# Altium PCB PCB4.PcbDoc
Units mil, origin at the board's own origin, x right, y up, seen from the top; angles counter-clockwise.
Board outline 2952.76 x 2952.76 mil, 4 copper layers (Top Layer, Mid 1 - POWER, Mid 2 - GND, Bottom Layer), stack 61.913 mil thick; 25 components, 43 nets, 198 pads, 183 vias.
Unrouted connection lines stored in the file: 1.
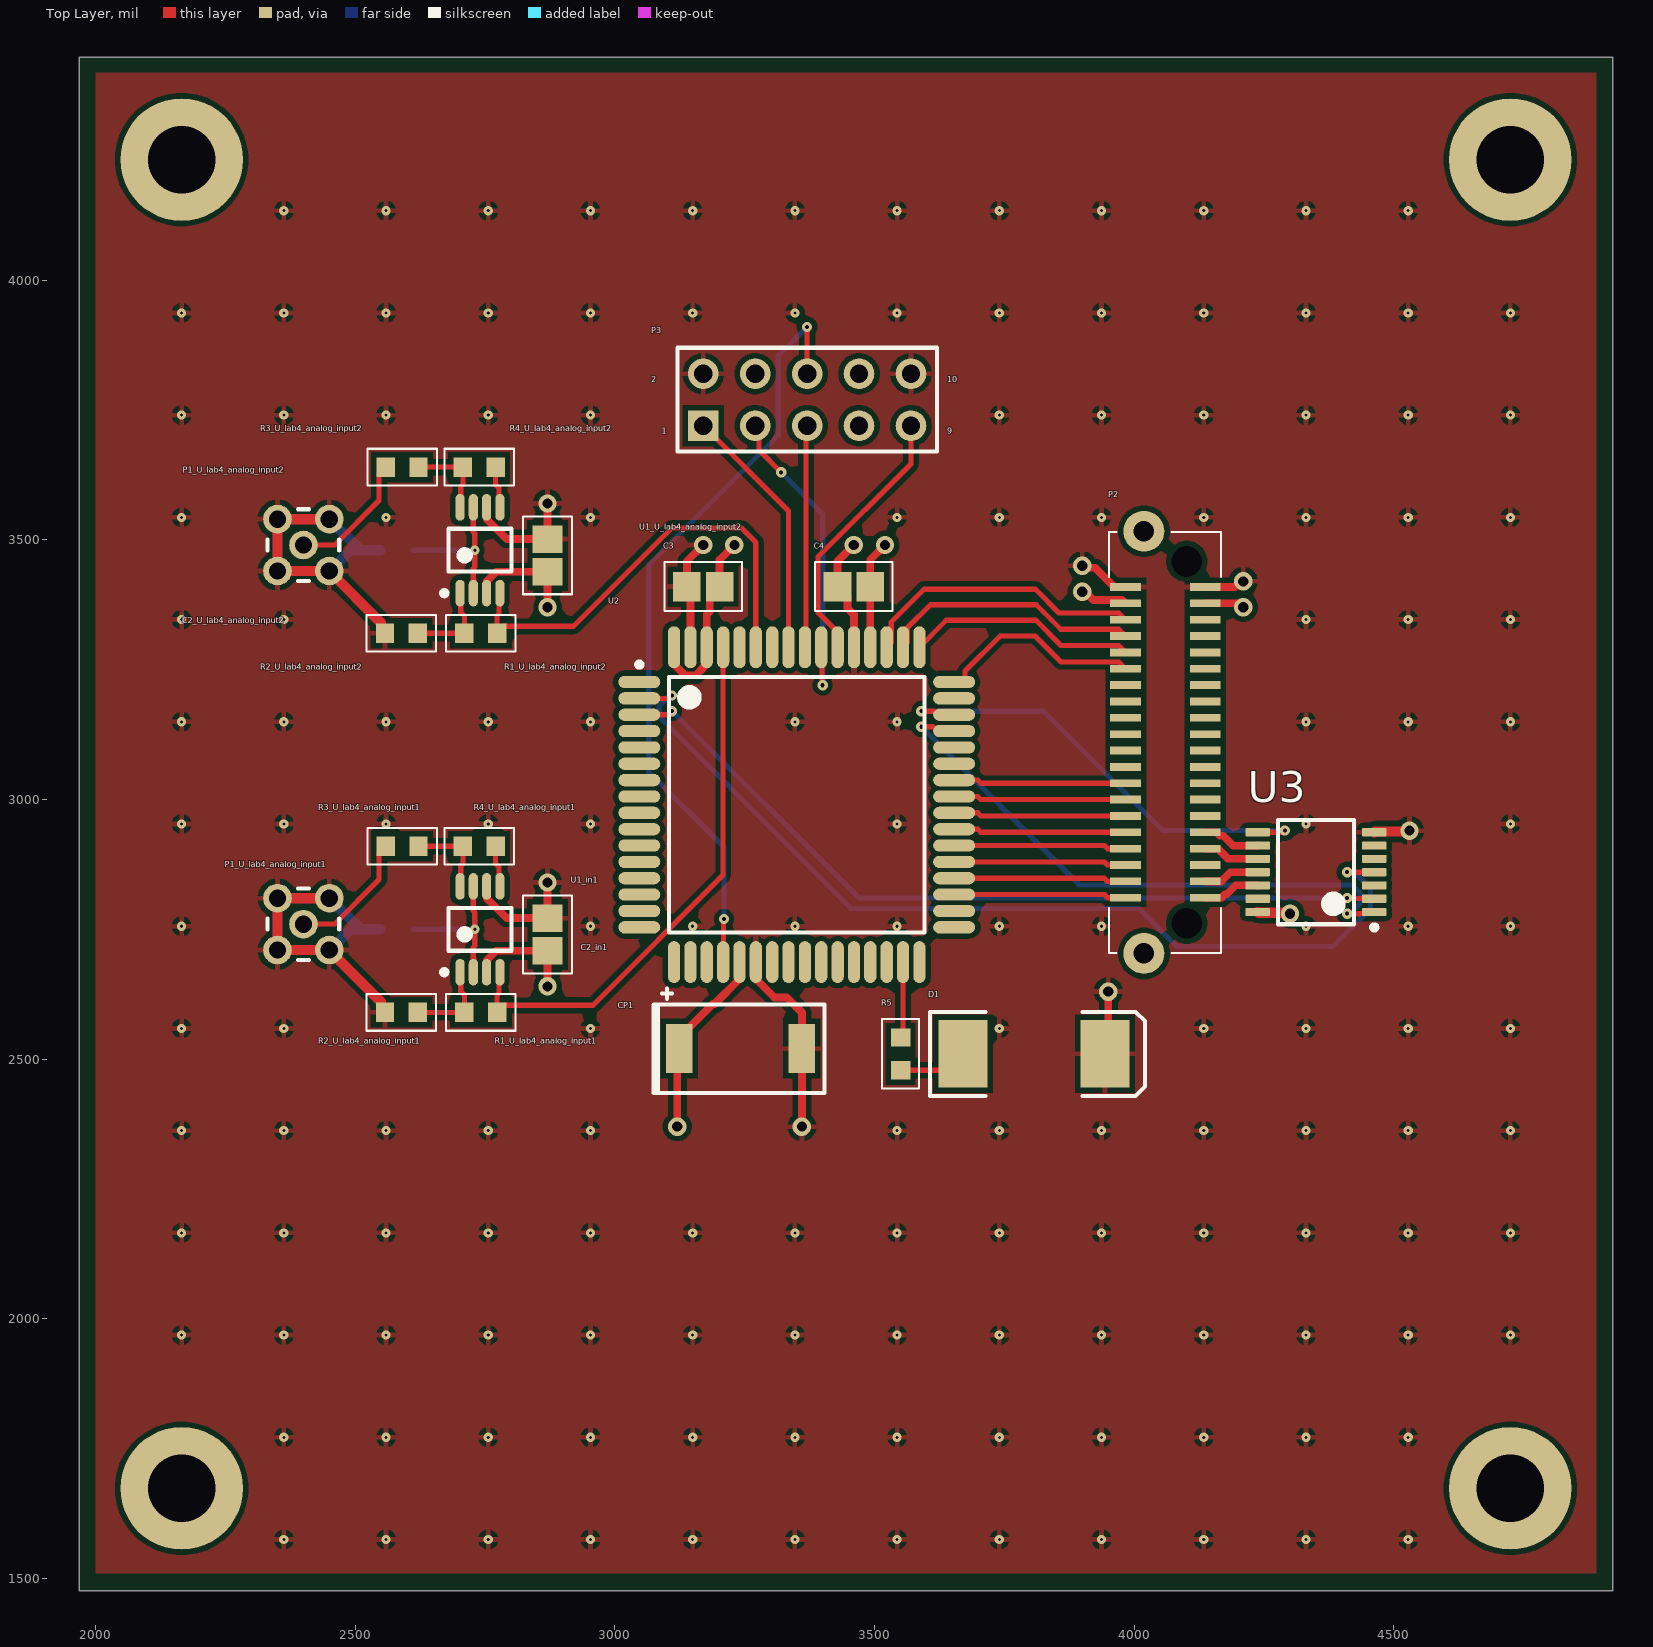
[diagram p0: Top Layer view]
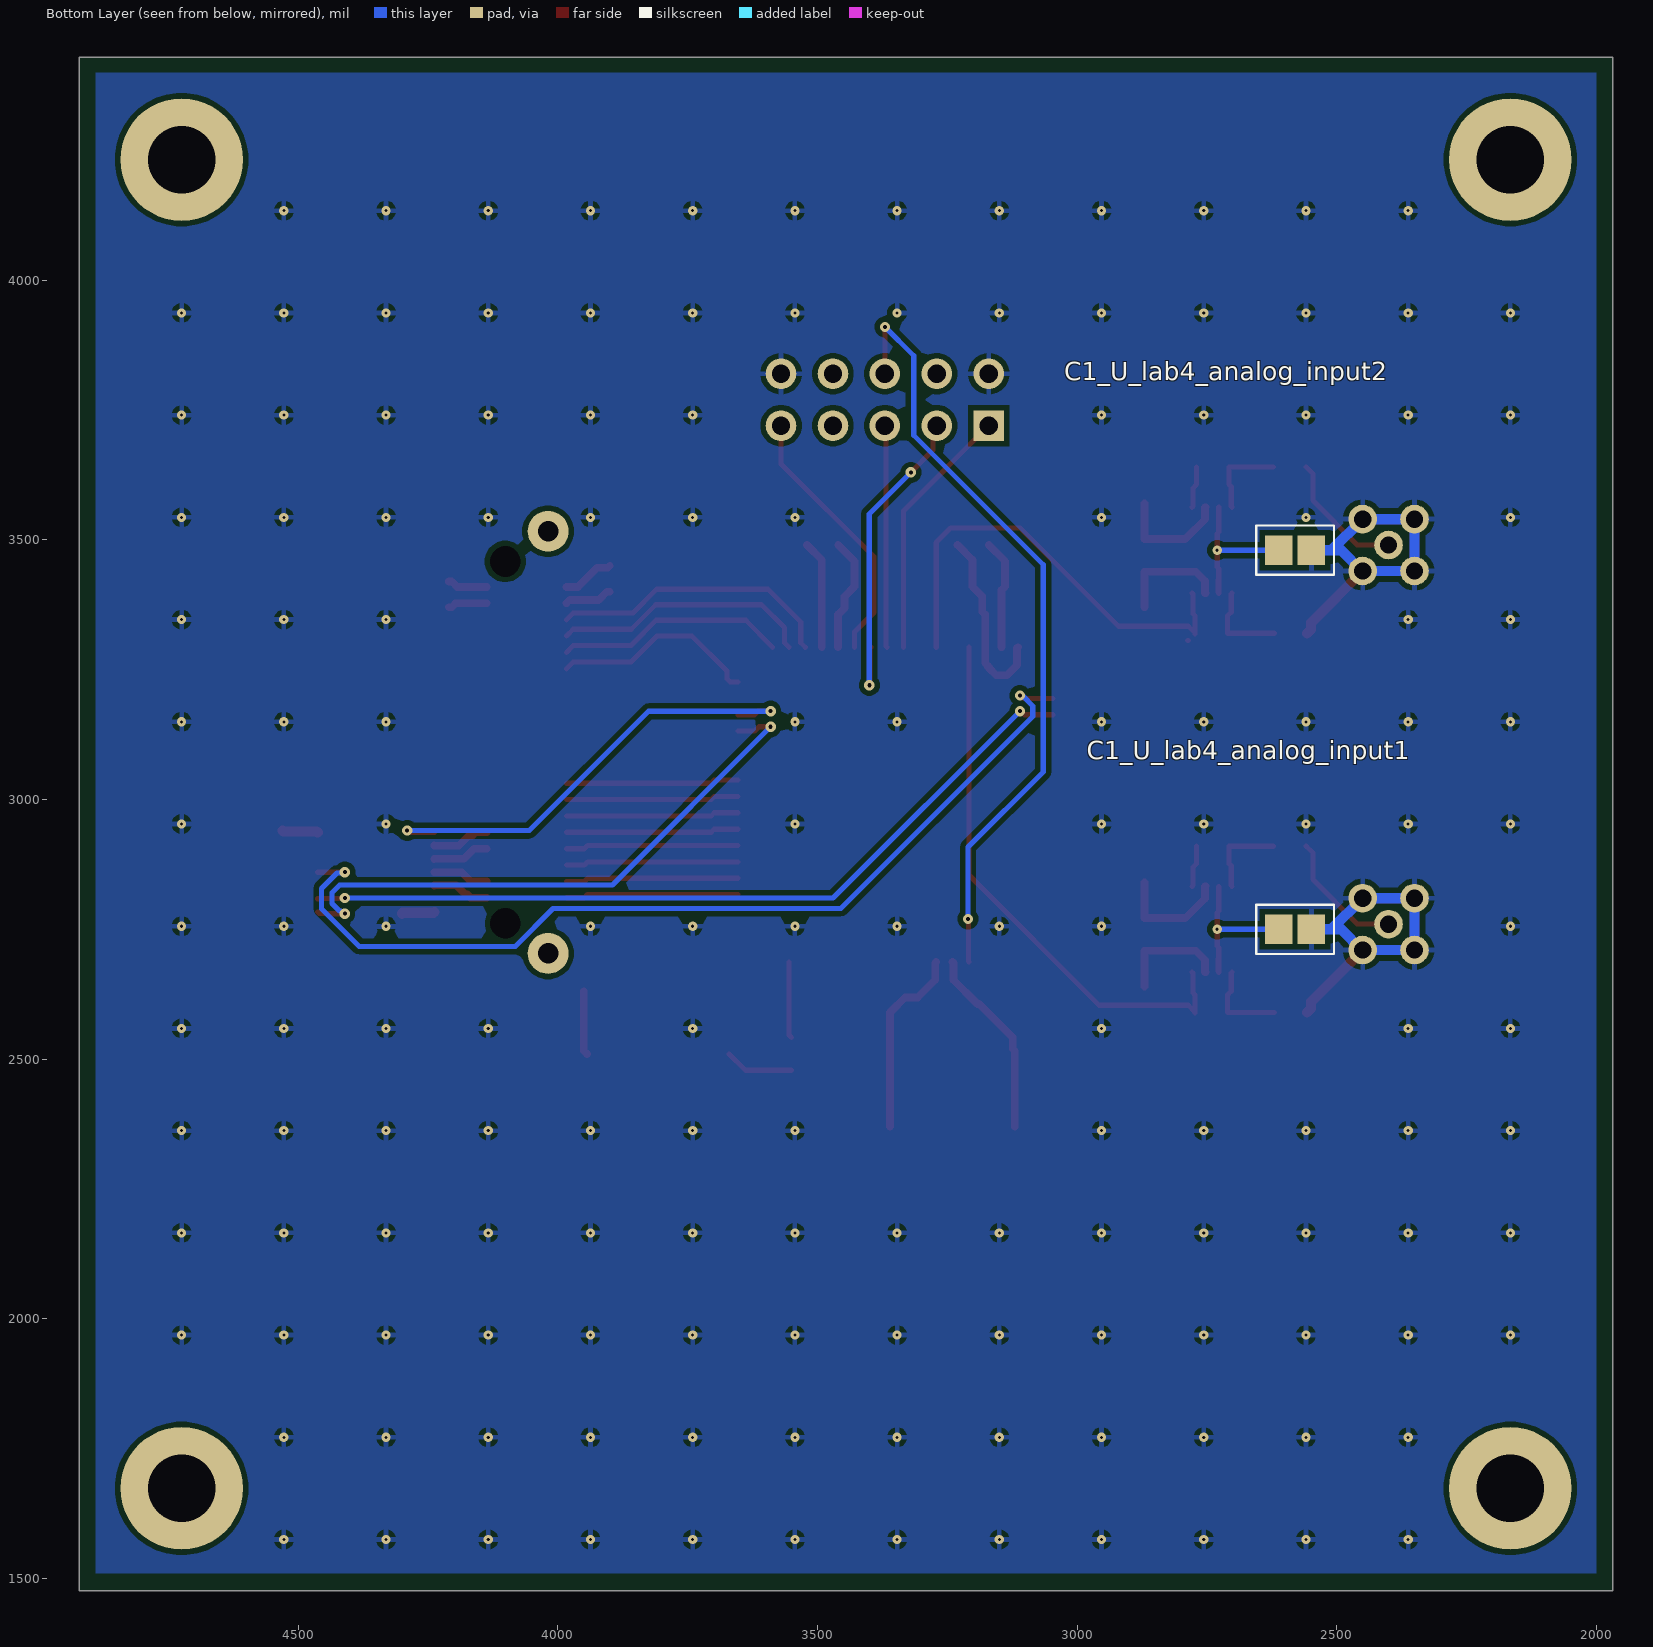
[diagram p1: Bottom Layer view, seen from below]
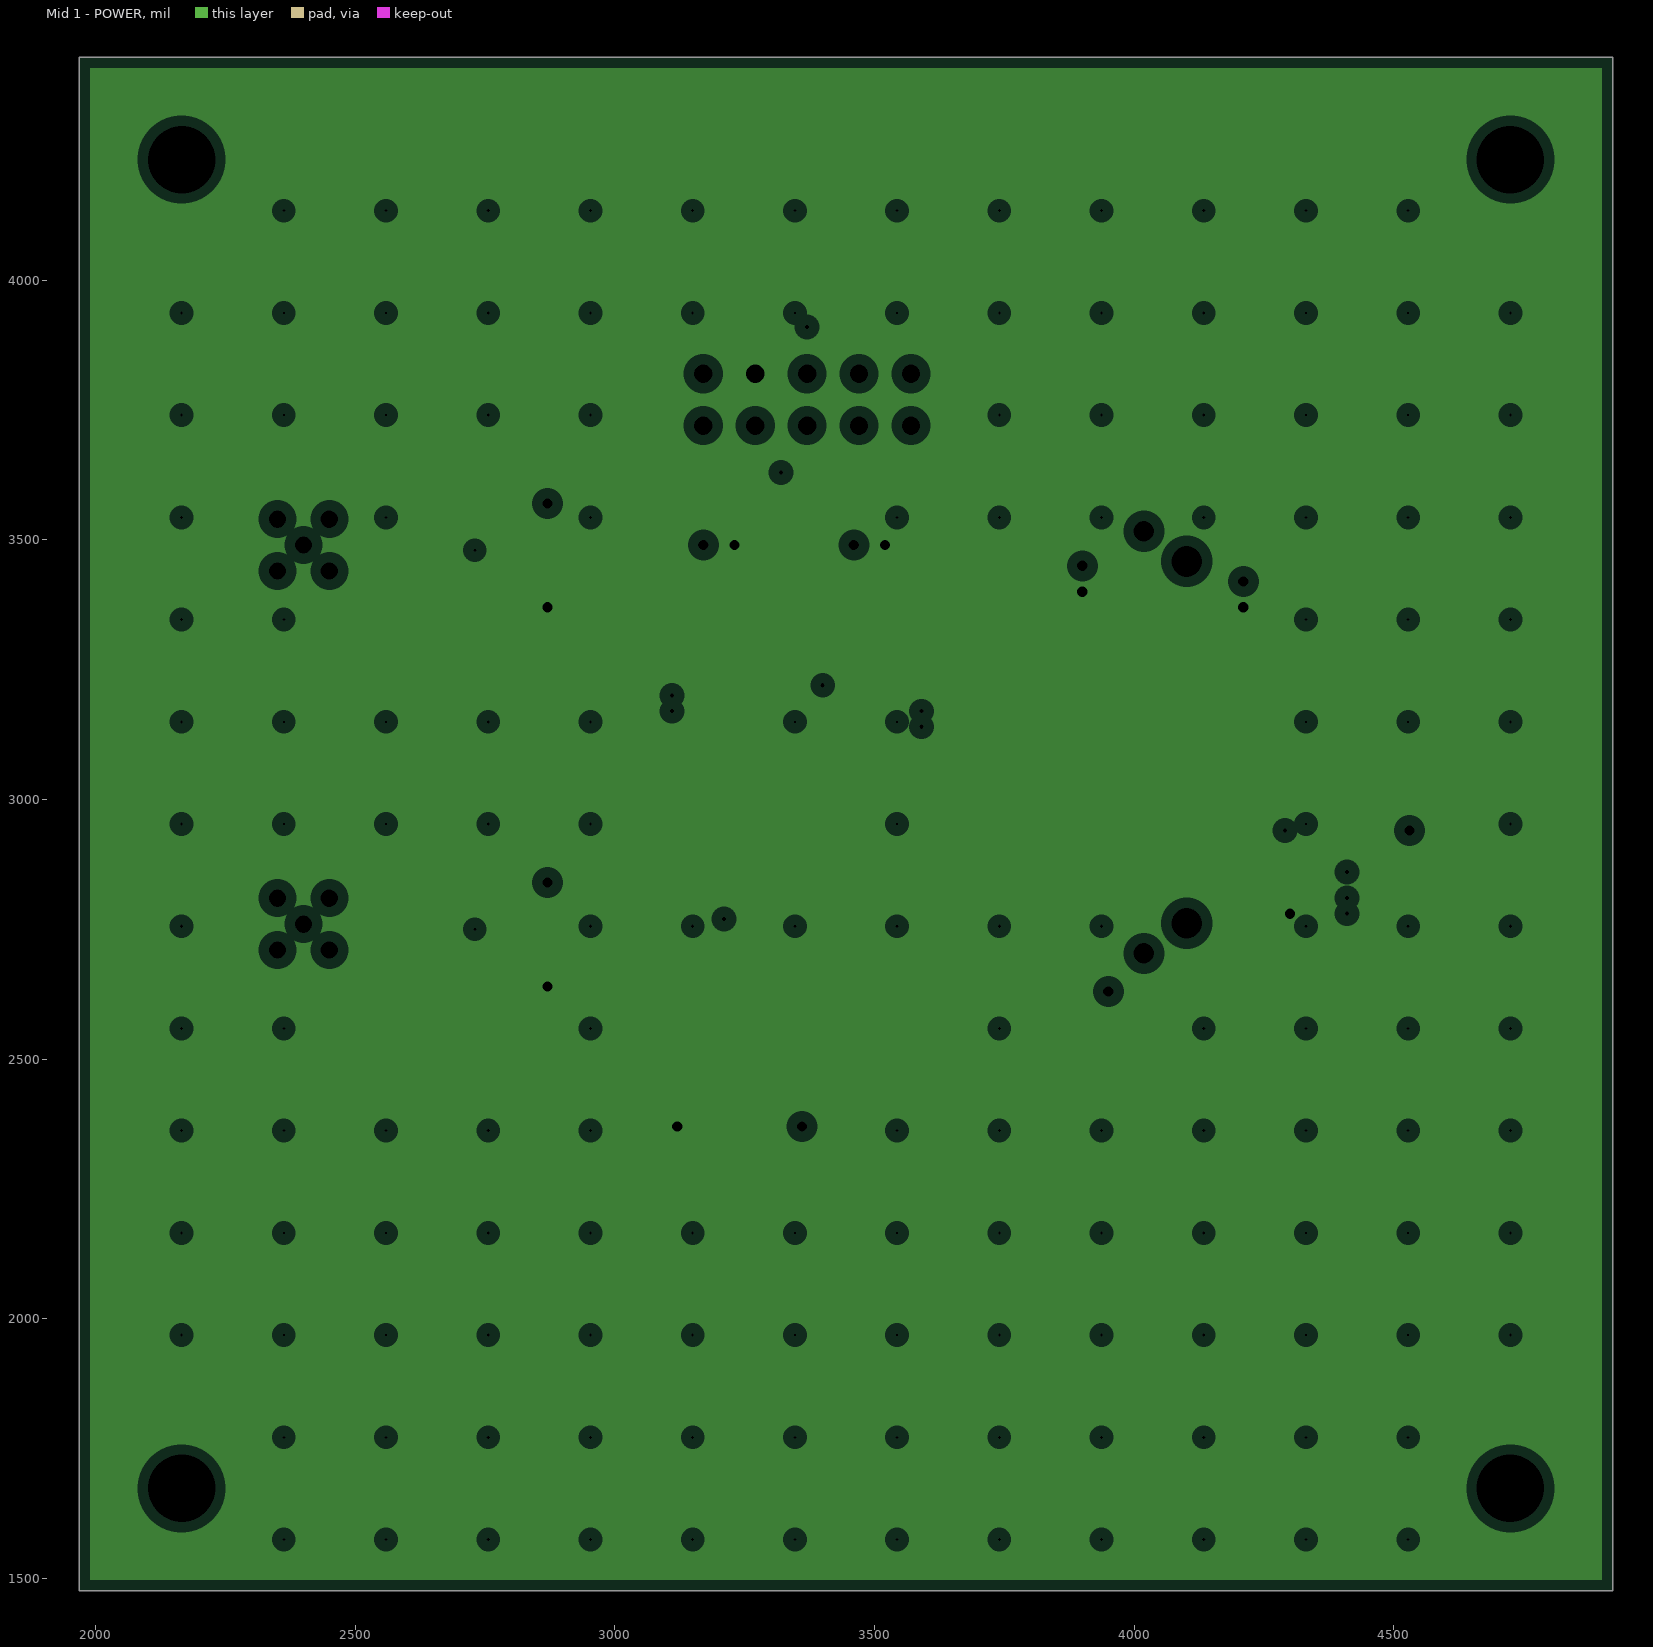
[diagram p2: Mid 1 - POWER, clearances drawn from the general rule]
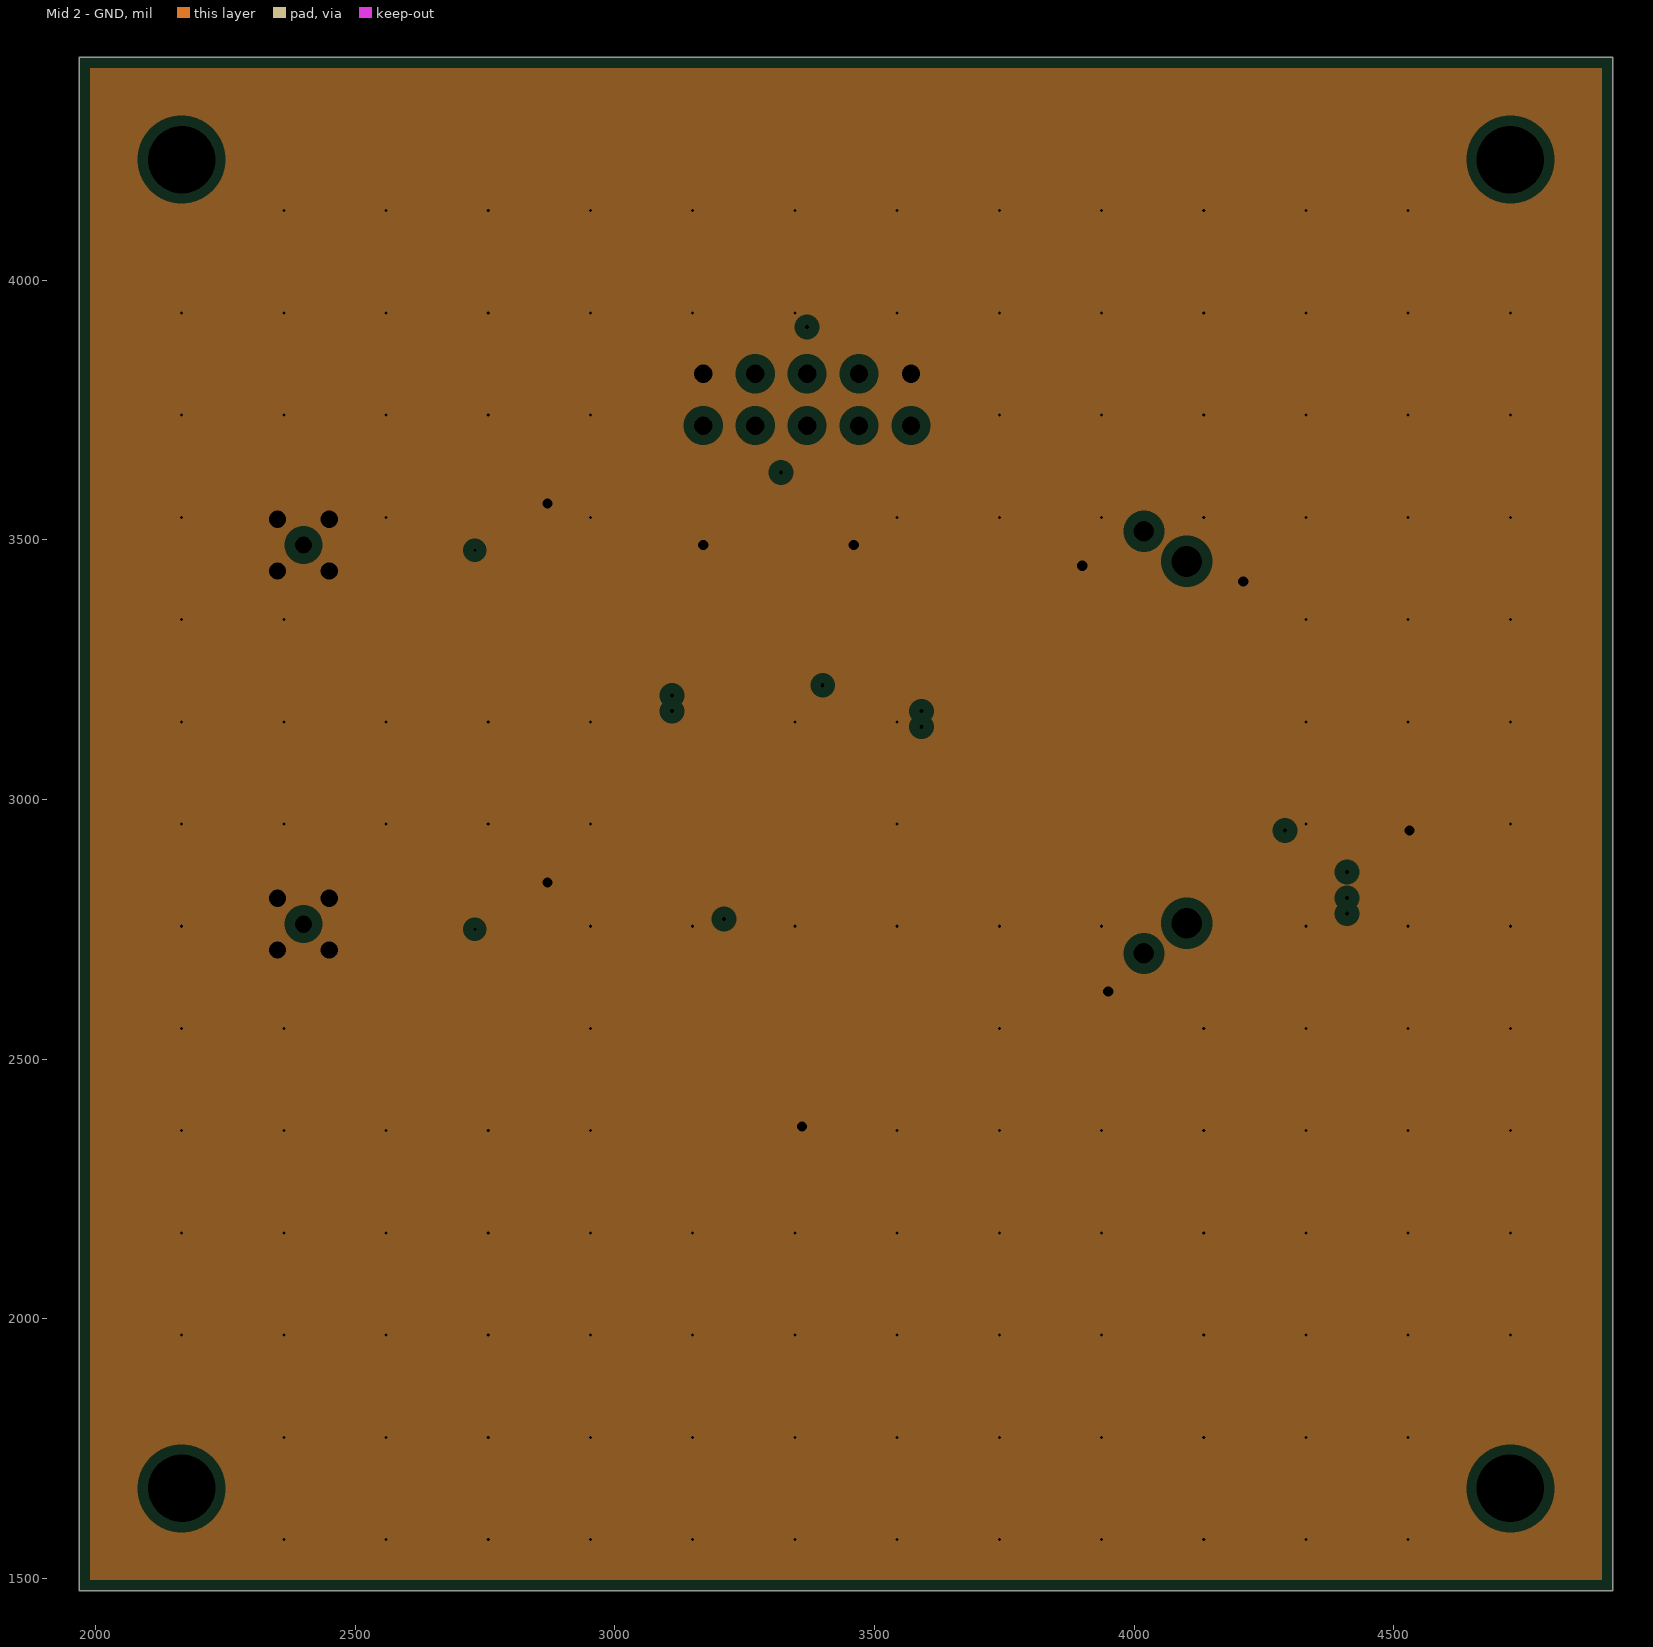
[diagram p3: Mid 2 - GND, clearances drawn from the general rule]
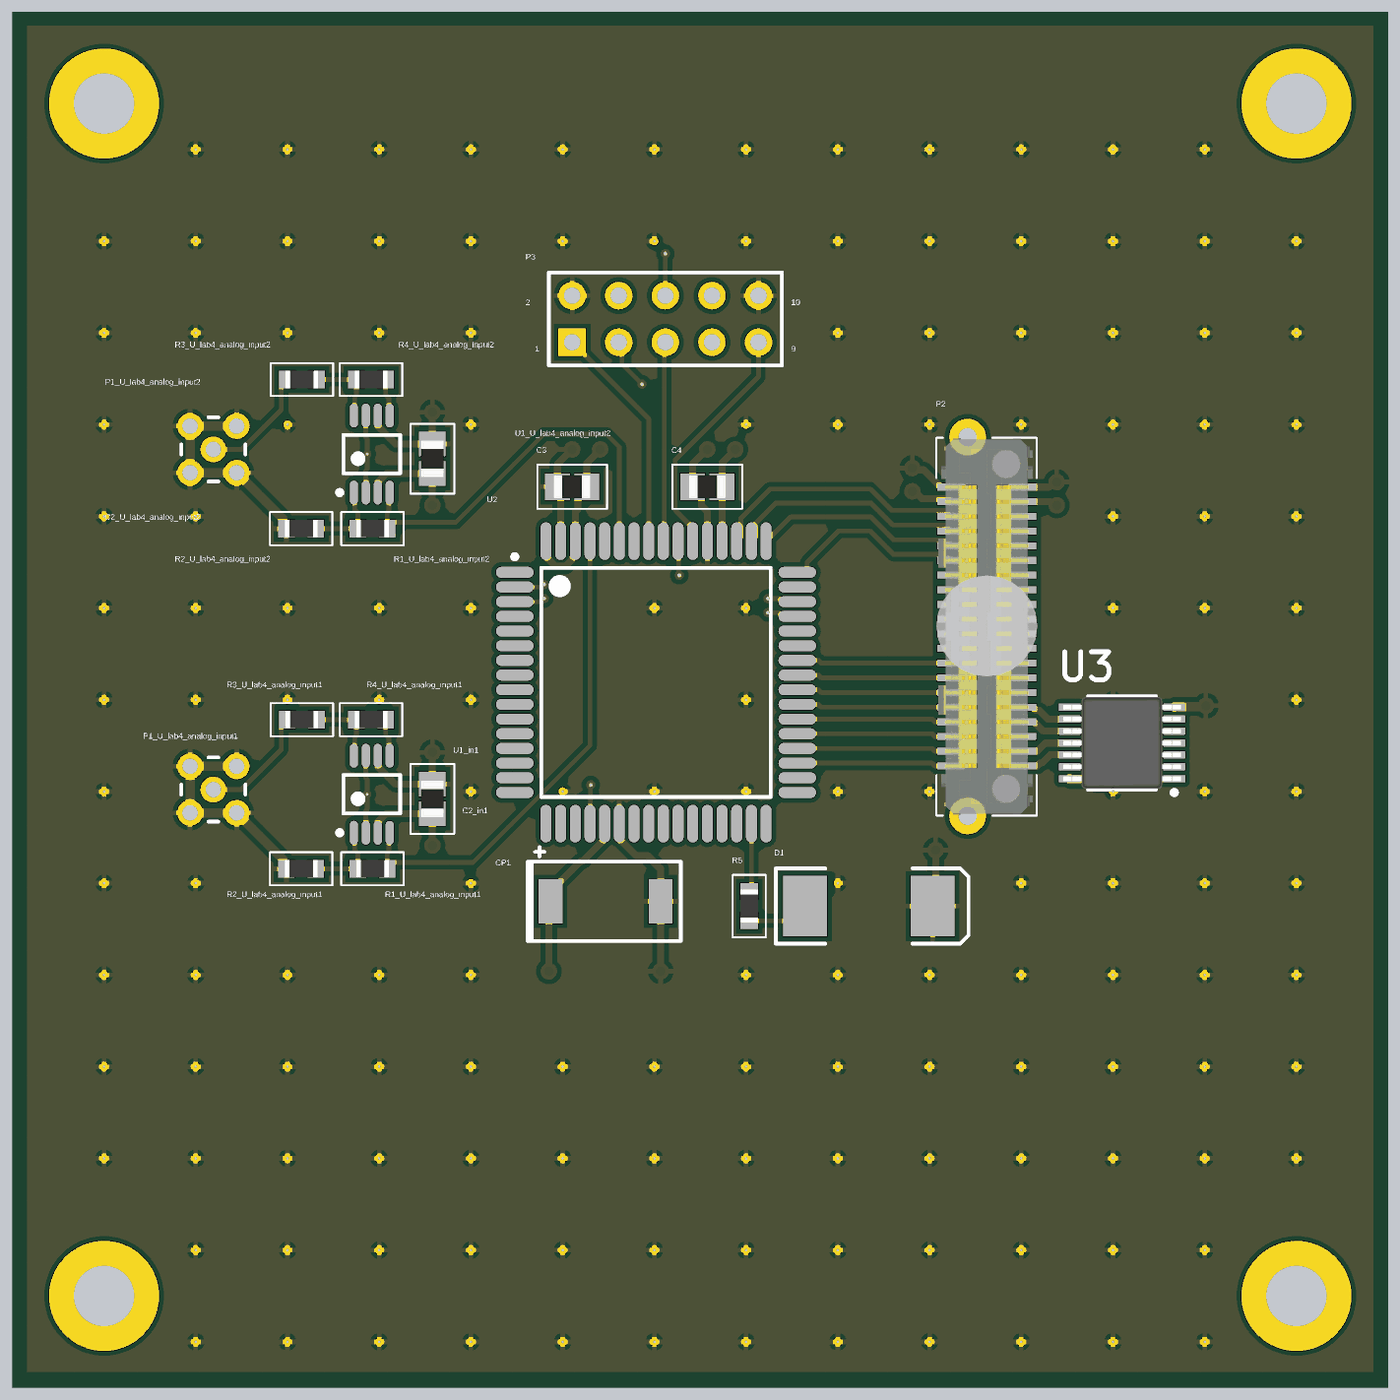
[diagram p4: 3D render of the assembled board from above, using the file's embedded part models]

## Layer stack, top to bottom
Top Solder: solder mask 0.4, Solder Resist, Dk 3.9
Top Layer: signal copper 0.7087
Dielectric 1: prepreg 14.8346, PP-021, Dk 3.9
Mid 1 - POWER: plane copper 1.378, net 5V0
Dielectric 2: core 28.0709, Core-039, Dk 3.9
Mid 2 - GND: plane copper 1.378, net GND
Dielectric 3: prepreg 14.8346, PP-021, Dk 3.9
Bottom Layer: signal copper 0.7087
Bottom Solder: solder mask 0.4, Solder Resist, Dk 3.9

## Board outline
1968.5,1476.38 1968.5,4429.13 4921.26,4429.13 4921.26,1476.38

## Design rules (kind name [scope] priority, off if disabled: settings)
Clearance [All] p1: gap=10 ignorepadtopadclearanceinfootprint=TRUE except(5.91: Arc-SMDPad Track-SMDPad)
DiffPairsRouting [All] p1: maxlimit=8 minlimit=3 mostfreqgap=4 toplayer_minwidth=3 toplayer_maxwidth=8 toplayer_prefwidth=4 bottomlayer_minwidth=3 bottomlayer_maxwidth=8 bottomlayer_prefwidth=4 maxuncoupledlength=500
HoleSize [All] p1: absolutevalues=TRUE maxlimit=236.22 minlimit=3.94 maxpercent=80.000 minpercent=20.000
MatchedLengths [InDifferentialPairClass('All Differential Pairs')] p1: tolerance=50 checknetsindiffpair=TRUE checkdiffpairvsdiffpair=FALSE checkxsignals=FALSE checkothers=FALSE
MatchedLengths GroupMatchedLengths [InDifferentialPairClass('All Differential Pairs')] p2: tolerance=200 checknetsindiffpair=FALSE checkdiffpairvsdiffpair=TRUE checkxsignals=TRUE checkothers=TRUE
MinimumSolderMaskSliver [All] p1: minsoldermaskwidth=3.5
PlaneClearance [All] p1: clearance=20
PlaneConnect [All] p1: planeconnectstyle=Relief reliefexpansion=20 reliefentries=4 reliefconductorwidth=10 reliefairgap=10
PolygonConnect [All] p1: connectstyle=Relief reliefconductorwidth=10 reliefentries=4 polygonreliefangle="90 Angle" airgapwidth=10
RoutingVias [All] p1: holewidth=28 width=50 viastyle="Through Hole" minholewidth=28 minwidth=50 maxholewidth=28 maxwidth=50
SolderMaskExpansion [All] p1: expansion=2 istentingtop=FALSE
SupplyNets "Schematic Supply Nets_1" [InNet('5V0')] p1: voltage=0.000
SupplyNets "Schematic Supply Nets" [InNet('GND')] p2: voltage=0.000
Width "Schematic Width Constraint_1" [InNet('5V0')] p1: maxlimit=50 minlimit=15 preferedwidth=20 minimp=50.000000 maximp=50.000000 favimp=50.000000
Width "Schematic Width Constraint" [InNet('GND')] p2: maxlimit=50 minlimit=15 preferedwidth=20 minimp=50.000000 maximp=50.000000 favimp=50.000000
Width [All] p3: maxlimit=10 minlimit=10 preferedwidth=10
25 further rules are at their usual default settings.

## Classes and differential pairs
channel class lab4_analog_input: U_lab4_analog_input1 U_lab4_analog_input2
net class PC[0..7]: PC0 PC1 PC2 PC3 PC4 PC5 PC6 PC7
net class OUT_P[1..2]: OUT_P1 OUT_P2
net class OUT_N[1..2]: OUT_N1 OUT_N2
component class U_lab4_microprocessor: C3 C4 CP1 D1 R5 U2 U3
component class U_lab4_analog_input2: C1_U_lab4_analog_input2 C2_U_lab4_analog_input2 P1_U_lab4_analog_input2 R1_U_lab4_analog_input2 R2_U_lab4_analog_input2 R3_U_lab4_analog_input2 R4_U_lab4_analog_input2 U1_U_lab4_analog_input2
component class U_lab4_analog_input1: C1_U_lab4_analog_input1 C2_in1 P1_U_lab4_analog_input1 R1_U_lab4_analog_input1 R2_U_lab4_analog_input1 R3_U_lab4_analog_input1 R4_U_lab4_analog_input1 U1_in1
component class lab4_schematic: P2 P3
differential pair DOUT: +DOUT_P -DOUT_N
differential pair DIN: +DIN_P -DIN_N

## Components (designator, comment, footprint, x,y, rotation, side; value= is the part's Value field where it differs from the comment)
C1_U_lab4_analog_input1 "10n" 0805_STD 2580,2750 r0 bottom (schematic designator C1)
C1_U_lab4_analog_input2 "10n" 0805_STD 2580,3480 r0 bottom (schematic designator C1)
C2_in1 "100n" 0805_STD 2870,2740 r270 top (schematic designator C2)
C2_U_lab4_analog_input2 "100n" 0805_STD 2870,3470 r270 top (schematic designator C2)
C3 "*" 0805_STD 3170,3410 r0 top
C4 "*" 0805_STD 3460,3410 r0 top
CP1 "*" VJ_TANTALUM_D 3241.89,2520 r0 top
D1 "Diode" SMC 3806.81,2510 r0 top
P1_U_lab4_analog_input1 "COAX-M" MMCX2.54-V5 2400,2760 r270 top (schematic designator P1)
P1_U_lab4_analog_input2 "COAX-M" MMCX2.54-V5 2400,3490 r270 top (schematic designator P1)
P2 "SAMTEC LSEM 40-pin" LSEM-120-03.0-L-DV-A-N-K-TR 4060,3110 r90 top
P3 "Header 5X2" HDR2X5 3170,3720 r0 top
R1_U_lab4_analog_input1 "Rfb" 0603 2741.5,2590 r0 top (schematic designator R1)
R1_U_lab4_analog_input2 "Rfb" 0603 2741.5,3320 r0 top (schematic designator R1)
R2_U_lab4_analog_input1 "Rin" 0603 2588.5,2590 r0 top (schematic designator R2)
R2_U_lab4_analog_input2 "Rin" 0603 2588.5,3320 r0 top (schematic designator R2)
R3_U_lab4_analog_input1 "Rin" 0603 2590,2910 r0 top (schematic designator R3)
R3_U_lab4_analog_input2 "Rin" 0603 2590,3640 r0 top (schematic designator R3)
R4_U_lab4_analog_input1 "Rfb" 0603 2738.5,2910 r0 top (schematic designator R4)
R4_U_lab4_analog_input2 "Rfb" 0603 2738.5,3640 r0 top (schematic designator R4)
R5 "10k" 0603 3550,2510 r90 top
U1_in1 "LTC1992IMS8" LT-MS8-8_L 2740,2750 r90 top (schematic designator U1)
U1_U_lab4_analog_input2 "LTC1992IMS8" LT-MS8-8_L 2740,3480 r90 top (schematic designator U1)
U2 "ATmega128-16AU" 64A_M 3350,2990 r0 top
U3 "DS90LV019TMTC" PW0014A_L 4350,2860 r180 top

## Footprints (in the part's own frame and the unit in brackets; to place one, negate y for a bottom-side part, rotate by r counter-clockwise, add the part's x,y. Pads: shape width x height; smd on the part's side, far side on the other; paste and mask are expansions set on the pad)
64A_M [mm] "Thin QFP, 64-Leads, Body 14x14mm, Pitch 0.8mm, IPC Low Density"
  oval 2.05x0.6 smd: 1(-7.7,6) 2(-7.7,5.2) 3(-7.7,4.4) 4(-7.7,3.6) 5(-7.7,2.8) 6(-7.7,2) 7(-7.7,1.2) 8(-7.7,0.4) 9(-7.7,-0.4) 10(-7.7,-1.2) 11(-7.7,-2) 12(-7.7,-2.8) 13(-7.7,-3.6) 14(-7.7,-4.4) 15(-7.7,-5.2) 16(-7.7,-6) 33(7.7,-6) 34(7.7,-5.2) 35(7.7,-4.4) 36(7.7,-3.6) 37(7.7,-2.8) 38(7.7,-2) 39(7.7,-1.2) 40(7.7,-0.4) 41(7.7,0.4) 42(7.7,1.2) 43(7.7,2) 44(7.7,2.8) 45(7.7,3.6) 46(7.7,4.4) 47(7.7,5.2) 48(7.7,6)
  oval 0.6x2.05 smd: 17(-6,-7.7) 18(-5.2,-7.7) 19(-4.4,-7.7) 20(-3.6,-7.7) 21(-2.8,-7.7) 22(-2,-7.7) 23(-1.2,-7.7) 24(-0.4,-7.7) 25(0.4,-7.7) 26(1.2,-7.7) 27(2,-7.7) 28(2.8,-7.7) 29(3.6,-7.7) 30(4.4,-7.7) 31(5.2,-7.7) 32(6,-7.7) 49(6,7.7) 50(5.2,7.7) 51(4.4,7.7) 52(3.6,7.7) 53(2.8,7.7) 54(2,7.7) 55(1.2,7.7) 56(0.4,7.7) 57(-0.4,7.7) 58(-1.2,7.7) 59(-2,7.7) 60(-2.8,7.7) 61(-3.6,7.7) 62(-4.4,7.7) 63(-5.2,7.7) 64(-6,7.7)
  silkscreen extent -7.82,-6.25 6.25,6.97, body extent -7,-7 7,7, height 1.6
0603 [mm] "Chip Resistor, 2-Leads, Body 1.63x0.81mm, IPC Medium Density"
  rect 0.9x0.95 smd: 1(-0.8,0) 2(0.8,0)
  silkscreen extent -1.7,-0.9 1.7,0.9, body extent -0.89,-0.47 0.89,0.47, height 0.51
0805_STD [mm]
  rect 1.35x1.45 smd: 1(-0.8,0) 2(0.8,0)
  silkscreen extent -1.9,-1.2 1.9,1.2, body extent -1,-0.63 1,0.63, height 0.65
HDR2X5 [mm] "Connector; Header; 5x2 Position"
  rect 1.5x1.5 hole 0.9: 1(0,0)
  round 1.5 hole 0.9: 2(0,2.54) 3(2.54,0) 4(2.54,2.54) 5(5.08,0) 6(5.08,2.54) 7(7.62,0) 8(7.62,2.54) 9(10.16,0) 10(10.16,2.54)
  silkscreen extent -1.27,-1.27 11.43,3.81
LSEM-120-03.0-L-DV-A-N-K-TR [mm] "Samtec LSEM 40-pin"
  round 2 hole 1 paste-2539.97 mask+0: 0(-10.325,1.05) 0(10.325,1.05)
  round 2.1 on Top Solder: 0(-10.325,1.05) 0(10.325,1.05)
  round 0 hole 1.5: 0(-8.85,-1.05) 0(8.85,-1.05)
  rect 0.38x1.5 smd: 1(7.6,-1.95) 2(7.6,1.95) 3(6.8,-1.95) 4(6.8,1.95) 5(6,-1.95) 6(6,1.95) 7(5.2,-1.95) 8(5.2,1.95) 9(4.4,-1.95) 10(4.4,1.95) 11(3.6,-1.95) 12(3.6,1.95) 13(2.8,-1.95) 14(2.8,1.95) 15(2,-1.95) 16(2,1.95) 17(1.2,-1.95) 18(1.2,1.95) 19(0.4,-1.95) 20(0.4,1.95) 21(-0.4,-1.95) 22(-0.4,1.95) 23(-1.2,-1.95) 24(-1.2,1.95) 25(-2,-1.95) 26(-2,1.95) 27(-2.8,-1.95) 28(-2.8,1.95) 29(-3.6,-1.95) 30(-3.6,1.95) 31(-4.4,-1.95) 32(-4.4,1.95) 33(-5.2,-1.95) 34(-5.2,1.95) 35(-6,-1.95) 36(-6,1.95) 37(-6.8,-1.95) 38(-6.8,1.95) 39(-7.6,-1.95) 40(-7.6,1.95)
  silkscreen extent -10.31,-2.71 10.29,2.75, body extent -10.25,-2.75 10.25,2.75, height 4.58
LT-MS8-8_L [mm] "SOP, 8-Leads, Body 3x3mm, Pitch 0.65mm, IPC High Density"
  oval 1.3x0.45 smd: 1(-2.1,0.975) 2(-2.1,0.325) 3(-2.1,-0.325) 4(-2.1,-0.975) 5(2.1,-0.975) 6(2.1,-0.325) 7(2.1,0.325) 8(2.1,0.975)
  silkscreen extent -2.22,-1.55 1.05,1.87, body extent -1.55,-1.55 1.55,1.55, height 1.1
MMCX2.54-V5 [mm] "Connector; RF Coaxial, MMCX, Thru-Hole; 5 Position; Vertical"
  round 1.4 hole 0.85: 1(0,0) 2(-1.27,-1.27) 3(1.27,-1.27) 4(1.27,1.27) 5(-1.27,1.27)
  silkscreen extent -1.75,-1.75 1.75,1.75
PW0014A_L [mm] "SOP, 14-Leads, Body 5.1x4.5mm, Pitch 0.65mm, IPC High Density"
  rrect25% 1.2x0.4 smd: 1(-2.85,1.95) 2(-2.85,1.3) 3(-2.85,0.65) 4(-2.85,0) 5(-2.85,-0.65) 6(-2.85,-1.3) 7(-2.85,-1.95) 8(2.85,-1.95) 9(2.85,-1.3) 10(2.85,-0.65) 11(2.85,0) 12(2.85,0.65) 13(2.85,1.3) 14(2.85,1.95)
  silkscreen extent -2.98,-2.55 1.85,2.82, body extent -3.21,-2.5 3.21,2.5, height 1
SMC [mm] "DO-214-AB/SMC; 2 C-Bend Leads; Body 7.9 x 5.9 mm, inc. leads (LxW)"
  rect 2.4x3.3 smd: 1(-3.475,0) 2(3.475,0)
  silkscreen extent -5.07,-2.05 5.43,2.05
VJ_TANTALUM_D [mm]
  rect 1.3x2.4 smd: 1(3,0) 2(-3,0)
  silkscreen extent -4.25,-2.16 4.1,2.95, body extent -3.94,-2.16 4.1,2.16, height 2.8

## Part data
C1_U_lab4_analog_input1 C1_U_lab4_analog_input2 C2_in1 C2_U_lab4_analog_input2 C3 C4: library part Capacitor
CP1: library part Capacitor_polarized
D1: "Default Diode", Code_JEDEC=DO-214-AB, LatestRevisionDate=17-Jul-2002, LatestRevisionNote="Re-released for DXP Platform.", PackageDescription="DO-214-AB/SMC; 2 C-Bend Leads; Body 7.9 x 5.9 mm, inc. leads (LxW)", PackageReference=SMC, PackageVersion=Sep-1996, Published=8-Jun-2000, Publisher="Altium Limited"
P1_U_lab4_analog_input1 P1_U_lab4_analog_input2: "RF Coaxial PCB Connector, MMCX; Thru-Hole, Vertical Mount Plug,  50 Ohm Impedance", PackageDocument="Rev. A, 16-Jun-1997", ComponentLink1Description="Manufacturer Link", ComponentLink1URL=http://www.amphenolrf.com/, DatasheetDocument=30-May-2003, DrillSize="Corresponds to nominal value.", LatestRevisionDate=15-Jul-2004, LatestRevisionNote="Component Replaced.", PackageReference=908-21103, PCB_Layout="Complies with manufacturer's recommendation.", Published=15-Jul-2004, Publisher="Altium Limited"
P2: library part LSEM-120-03.0-X-DV-A-N-K, Manufacturer=SAMTEC, Part Number=LSEM-120-03.0-X-DV-A-N-K
P3: "Header, 5-Pin, Dual row", LatestRevisionDate=17-Jul-2002, LatestRevisionNote="Re-released for DXP Platform.", Publisher="Altium Limited"
R1_U_lab4_analog_input1 R1_U_lab4_analog_input2 R2_U_lab4_analog_input1 R2_U_lab4_analog_input2 R3_U_lab4_analog_input1 R3_U_lab4_analog_input2 R4_U_lab4_analog_input1 R4_U_lab4_analog_input2 R5: library part Resistor
U1_in1 U1_U_lab4_analog_input2: library part CMP-0359-00506-2, "Single Channel, Low Power, Fully Differential Input / Output Amplifier / Driver, 4 MHz Typical GBW, 0.75 V/us Typical SR, 2.4 to 12 V, 8-Pin SOP (MS8-8), Industrial", Linear Technology Part Number=LTC1992, Manufacturer="Linear Technology", Channels (#)=1, ComponentLink1Description="Manufacturer URL", ComponentLink1URL=http://www.linear.com/, ComponentLink2Description=Datasheet, ComponentLink2URL=http://cds.linear.com/docs/en/datasheet/1992fb.pdf, ComponentLink3Description="Package Specification", ComponentLink3URL=http://cds.linear.com/docs/en/packaging/05081610_G_SO8.pdf, DatasheetVersion="Rev. A", GBW (MHz) Typical=4, Is (mA) Typical=0.65, Mounting Technology="Surface Mount", PackageDescription="8-Lead Plastic Small Outline, Body 3.9 x 4.9 mm, Pitch 1.27 mm", PackageReference=LT-MS8-8, PackageVersion="Rev G", PartNumber=LTC1992IMS8, RevisionNote="URLs updated", SR (V/us) Typical=0.75, Type=DIFF, Vos (mV) Typical=0.25, Vs Max (V)=12, Vs Min (V)=2.4
U2: library part CMP-0095-00259-2, "8-bit AVR Microcontroller, 4.5-5.5V, 128KB Flash, 4KB EEPROM, 4KB SRAM, 64-pin TQFP, Industrial Grade (-40°C to 85°C)", Code_JEDEC=MS-026-AEB, ComponentLink1Description="Manufacturer URL", ComponentLink1URL=http://www.atmel.com/, ComponentLink2Description="ATmega128(L) Datasheet", ComponentLink2URL=http://www.atmel.com/dyn/resources/prod_documents/doc2467.pdf, ComponentLink3Description="ATmega128(L) Summary", ComponentLink3URL=http://www.atmel.com/dyn/resources/prod_documents/2467S.pdf, DatasheetVersion="revX, Jun-2011", PackageDescription="64-Pin Plastic Thin Profile Quad Flat Pack, 14 x 14 x 1.0 mm Body, 0.8 mm Pitch (TQFP)", PackageReference=64A, PackageVersion="revC, Oct-2010", RevisionNote="PackageVersion updated. URLs added."
U3: library part CMP-0058-01150-3, "3.3V or 5V LVDS Driver/Receiver, 14-pin TSSOP", Manufacturer="Texas Instruments", PackageTopMarking=NSZXYTT*LV019T*MTC, PowerWise=N, Code_JEDEC=MO-153-AB-1, ComponentLink1Description="Datasheet URL", ComponentLink1URL=http://www.ti.com/general/docs/lit/getliterature.tsp?genericPartNumber=DS90LV019&fileType=pdf, CompType="Interface IC", PackageDescription="Molded TSSOP, JEDEC, 5 x 4.4 x 0.9mm Body, 14 Lead, 0.65mm Pitch", PackageReference=PW0014A, PinCount=14, RoHS=N

## Free pads (board coordinates)
  round 236.22 hole 129.92: 3(2165.35,1673.23) 3(2165.35,4232.28) 3(4724.41,1673.23) 3(4724.41,4232.28)

## Via types
v1: diameter 17.72/17.72 (per signal layer), hole 5.91, Top Layer to Bottom Layer, 152 vias
v2: diameter 19.68, hole 7.87, Top Layer to Bottom Layer, tented both sides, 12 vias
v3: diameter 35.43, hole 19.68, Top Layer to Mid 2 - GND, tented both sides, 8 vias
v4: diameter 35.43, hole 19.68, Top Layer to Mid 1 - POWER, tented both sides, 7 vias
v5: diameter 17.72/17.72 (per signal layer), hole 5.91, Top Layer to Bottom Layer, tented both sides, 2 vias
v6: diameter 35.43, hole 19.68, Top Layer to Mid 1 - POWER, tented top, 1 vias
v7: diameter 35.43, hole 19.68, Top Layer to Mid 2 - GND, tented top, 1 vias

## Nets (pads, with @x,y where several pads share a name; then routed paths per layer and width w, separated by ;. In a path a pad name is that pad's centre, name@x,y a point inside that pad or via, vN(x,y) a via of type N, cw(c..) or ccw(c..) an arc to the next point about the centre after c; other vN are vias at no path point)
5V0: C2_in1.2 C2_U_lab4_analog_input2.2 C3.2 C4.2 CP1.2 P2.3 P2.4 P3.4 U1_in1.3 U1_U_lab4_analog_input2.3 U2.21 U2.52 U2.62 U2.64 U3.14 | length 1606.8
  Top Layer w15: U1_in1.3 2753.32,2667.84 2753.32,2690.47 2771.35,2708.5 C2_in1.2 v4(2870,2640) ; U1_U_lab4_analog_input2.3 2753.32,3397.84 2753.32,3420.47 2771.35,3438.5 C2_U_lab4_analog_input2.2 v4(2870,3370) ; U2.64 3115.43,3291.5 3115.43,3258.79 3134.83,3239.39 3155.72,3239.39 3170.49,3254.16 3170.49,3255.99 3176.77,3262.27 U2.62 3176.77,3356 3182.42,3361.65 3182.42,3390.93 C3.2 3201.5,3461.5 v4(3230,3490) ; v4(3120,2370) 3120,2516.22 CP1.2 3123.78,2541.65 3188.24,2606.12 3191.74,2606.12 3238.11,2652.49 3238.11,2685.2 U2.21 ; U2.52 3491.73,3409.76 C4.2 3491.5,3461.5 v4(3520,3490) ; v4(3900,3400) 3905.53,3400 3921.32,3384.21 3976.91,3384.21 P2.4@3983.39,3377.74 ; P2.4 P2.4@3983.37,3377.72 ; P2.3 4196.75,3377.72 4204.47,3370 v4(4210,3370)
  Top Layer w20: U3.14 4239.41,2781.61 4298.39,2781.61 v6(4300,2780)
\R\E\S\E\T\: P3.6 U2.20 | length 1500.1
  Top Layer w10: U2.20 3209.13,2687.72 3209.13,2769.13 v2(3210,2770) ; P3.6 v2(3370,3910)
  Bottom Layer w10: v2(3210,2770) 3210,2908.18 3065.16,3053.02 3065.16,3452.19 3314.53,3701.56 3314.53,3854.53 v2(3370,3910)
ADC1_N: U2.60
ADC2_N: U2.58
DIN_N: P2.31 U3.9 | length 111.9
  Top Layer w15: P2.31 4158.78,2936.77 4165.28,2930.28 4171.6,2930.28 4190.99,2910.89 4237.5,2910.89 U3.9
DIN_P: P2.33 U3.10 | length 109.2
  Top Layer w15: P2.33 4161.24,2905.28 4180.63,2885.89 4237.5,2885.89 U3.10
DOUT_N: P2.37 U3.11 | length 108.4
  Top Layer w15: P2.37 4167.8,2842.28 4185.22,2859.7 4237.5,2859.7 U3.11
DOUT_P: P2.39 U3.12 | length 111.1
  Top Layer w15: P2.39 4168.14,2810.81 4174.62,2817.28 4178.15,2817.28 4195.57,2834.7 4237.5,2834.7 U3.12
GND: C1_U_lab4_analog_input1.1 C1_U_lab4_analog_input2.1 C2_in1.1 C2_U_lab4_analog_input2.1 C3.1 C4.1 CP1.1 D1.2 P1_U_lab4_analog_input1.2 P1_U_lab4_analog_input1.3 P1_U_lab4_analog_input1.4 P1_U_lab4_analog_input1.5 P1_U_lab4_analog_input2.2 P1_U_lab4_analog_input2.3 P1_U_lab4_analog_input2.4 P1_U_lab4_analog_input2.5 P2.1 P2.2 P3.2 P3.10 R2_U_lab4_analog_input1.1 R2_U_lab4_analog_input2.1 U1_in1.6 U1_U_lab4_analog_input2.6 U2.22 U2.53 U2.63 U3.7 | length 3570.2
  Top Layer w15: U1_in1.6 2753.32,2832.16 2753.32,2809.53 2791.35,2771.5 C2_in1.1 v3(2870,2840) ; U1_U_lab4_analog_input2.6 2753.32,3562.16 2753.32,3539.53 2791.35,3501.5 C2_U_lab4_analog_input2.1 v3(2870,3570) ; U2.63 3145.28,3403.23 C3.1 3138.5,3458.5 v3(3170,3490) ; U2.22 3272.91,2685.2 3272.91,2652.49 3306.6,2618.8 3330.94,2618.8 3360,2589.74 CP1.1 v3(3360,2370) ; v3(3460,3490) 3428.5,3458.5 C4.1 3447.58,3390.93 3447.58,3368.66 3460.24,3356 U2.53 ; v3(3900,3450) 3903.91,3446.09 3924.34,3446.09 3961.22,3409.21 P2.2 ; D1.2 3950,2516.38 v3(3950,2630) ; P2.1 4193.68,3409.21 4204.47,3420 v3(4210,3420)
  Top Layer w20: P1_U_lab4_analog_input1.5 P1_U_lab4_analog_input1.2 P1_U_lab4_analog_input1.3 P1_U_lab4_analog_input1.4 2549.29,2610.71 2549.29,2597.72 R2_U_lab4_analog_input1.1 ; P1_U_lab4_analog_input2.5 P1_U_lab4_analog_input2.2 P1_U_lab4_analog_input2.3 P1_U_lab4_analog_input2.4 2549.29,3340.71 2549.29,3327.72 R2_U_lab4_analog_input2.1 ; U3.7 4463.82,2938.39 4528.39,2938.39 v7(4530,2940)
  Bottom Layer w20: 2519.95,2750 2510,2750 ; 2519.95,3480 2510,3480 ; C1_U_lab4_analog_input1.1 2510,2750 ; C1_U_lab4_analog_input2.1 2510,3480 ; 2510,2750 P1_U_lab4_analog_input1.5 P1_U_lab4_analog_input1.2 P1_U_lab4_analog_input1.3 P1_U_lab4_analog_input1.4 2451.4,2710 2491.4,2750 2510,2750 ; 2510,3480 P1_U_lab4_analog_input2.5 P1_U_lab4_analog_input2.2 P1_U_lab4_analog_input2.3 P1_U_lab4_analog_input2.4 2451.4,3440 2491.4,3480 2510,3480
  other v1: 2362.2,1574.8 2559.05,1574.8 2755.9,1574.8 2952.75,1574.8 3149.6,1574.8 3346.45,1574.8 3543.3,1574.8 3740.15,1574.8 3937,1574.8 4133.85,1574.8 4330.7,1574.8 4527.55,1574.8 2362.2,1771.65 2559.05,1771.65 2755.9,1771.65 2952.75,1771.65 3149.6,1771.65 3346.45,1771.65 3543.3,1771.65 3740.15,1771.65 3937,1771.65 4133.85,1771.65 4330.7,1771.65 4527.55,1771.65 2165.35,1968.5 2362.2,1968.5 2559.05,1968.5 2755.9,1968.5 2952.75,1968.5 3149.6,1968.5 3346.45,1968.5 3543.3,1968.5 3740.15,1968.5 3937,1968.5 4133.85,1968.5 4330.7,1968.5 4527.55,1968.5 4724.4,1968.5 2165.35,2165.35 2362.2,2165.35 2559.05,2165.35 2755.9,2165.35 2952.75,2165.35 3149.6,2165.35 3346.45,2165.35 3543.3,2165.35 3740.15,2165.35 3937,2165.35 4133.85,2165.35 4330.7,2165.35 4527.55,2165.35 4724.4,2165.35 2165.35,2362.2 2362.2,2362.2 2559.05,2362.2 2755.9,2362.2 2952.75,2362.2 3543.3,2362.2 3740.15,2362.2 3937,2362.2 4133.85,2362.2 4330.7,2362.2 4527.55,2362.2 4724.4,2362.2 2165.35,2559.05 2362.2,2559.05 2952.75,2559.05 3740.15,2559.05 4133.85,2559.05 4330.7,2559.05 4527.55,2559.05 4724.4,2559.05 2165.35,2755.9 2952.75,2755.9 3149.6,2755.9 3346.45,2755.9 3543.3,2755.9 3740.15,2755.9 3937,2755.9 4330.7,2755.9 4527.55,2755.9 4724.4,2755.9 2165.35,2952.75 2362.2,2952.75 2559.05,2952.75 2755.9,2952.75 2952.75,2952.75 3543.3,2952.75 4330.7,2952.75 4724.4,2952.75 2165.35,3149.6 2362.2,3149.6 2559.05,3149.6 2755.9,3149.6 2952.75,3149.6 3346.45,3149.6 3543.3,3149.6 4330.7,3149.6 4527.55,3149.6 4724.4,3149.6 2165.35,3346.45 2362.2,3346.45 4330.7,3346.45 4527.55,3346.45 4724.4,3346.45 2165.35,3543.3 2559.05,3543.3 2952.75,3543.3 3543.3,3543.3 3740.15,3543.3 3937,3543.3 4133.85,3543.3 4330.7,3543.3 4527.55,3543.3 4724.4,3543.3 2165.35,3740.15 2362.2,3740.15 2559.05,3740.15 2755.9,3740.15 2952.75,3740.15 3740.15,3740.15 3937,3740.15 4133.85,3740.15 4330.7,3740.15 4527.55,3740.15 4724.4,3740.15 2165.35,3937 2362.2,3937 2559.05,3937 2755.9,3937 2952.75,3937 3149.6,3937 3346.45,3937 3543.3,3937 3740.15,3937 3937,3937 4133.85,3937 4330.7,3937 4527.55,3937 4724.4,3937 2362.2,4133.85 2559.05,4133.85 2755.9,4133.85 2952.75,4133.85 3149.6,4133.85 3346.45,4133.85 3543.3,4133.85 3740.15,4133.85 3937,4133.85 4133.85,4133.85 4330.7,4133.85 4527.55,4133.85
IN_U_lab4_analog_input1: P1_U_lab4_analog_input1.1 R3_U_lab4_analog_input1.1 | length 250.9
  Top Layer w10: P1_U_lab4_analog_input1.1 2460.19,2760 2545.79,2845.6 2545.79,2897.28 R3_U_lab4_analog_input1.1
IN_U_lab4_analog_input2: P1_U_lab4_analog_input2.1 R3_U_lab4_analog_input2.1 | length 250.9
  Top Layer w10: P1_U_lab4_analog_input2.1 2460.19,3490 2545.79,3575.6 2545.79,3627.28 R3_U_lab4_analog_input2.1
NetC1_U_lab4_analog_input1_2: C1_U_lab4_analog_input1.2 U1_in1.2 U1_in1.7 | length 313.1
  Top Layer w10: U1_in1.7 2727.2,2785.11 2730,2782.31 v5(2730,2750) 2730,2717.69 2727.2,2714.89 U1_in1.2 2728.68,2668.8 2728.68,2693.68
  Bottom Layer w10: C1_U_lab4_analog_input1.2 v5(2730,2750)
NetC1_U_lab4_analog_input2_2: C1_U_lab4_analog_input2.2 U1_U_lab4_analog_input2.2 U1_U_lab4_analog_input2.7 | length 313.1
  Top Layer w10: U1_U_lab4_analog_input2.7 2727.2,3515.11 2730,3512.31 v5(2730,3480) 2730,3447.69 2727.2,3444.89 U1_U_lab4_analog_input2.2 2728.68,3398.8 2728.68,3423.68
  Bottom Layer w10: C1_U_lab4_analog_input2.2 v5(2730,3480)
NetD1_1: D1.1 R5.1 | length 133
  Top Layer w10: R5.1 3638.5,2478.5 D1.1
NetR1_U_lab4_analog_input1_1: R1_U_lab4_analog_input1.1 R2_U_lab4_analog_input1.2 U1_in1.1 | length 170.8
  Top Layer w10: R2_U_lab4_analog_input1.2 R1_U_lab4_analog_input1.1 2710,2623.7 2703.09,2630.61 2703.09,2665.85 U1_in1.1
NetR1_U_lab4_analog_input2_1: R1_U_lab4_analog_input2.1 R2_U_lab4_analog_input2.2 U1_U_lab4_analog_input2.1 | length 170.8
  Top Layer w10: R2_U_lab4_analog_input2.2 R1_U_lab4_analog_input2.1 2710,3353.7 2703.09,3360.61 2703.09,3395.85 U1_U_lab4_analog_input2.1
NetR3_U_lab4_analog_input1_2: R3_U_lab4_analog_input1.2 R4_U_lab4_analog_input1.1 U1_in1.8 | length 165.1
  Top Layer w10: R3_U_lab4_analog_input1.2 R4_U_lab4_analog_input1.1 2707.01,2876.3 2703.09,2872.38 2703.09,2834.15 U1_in1.8
NetR3_U_lab4_analog_input2_2: R3_U_lab4_analog_input2.2 R4_U_lab4_analog_input2.1 U1_U_lab4_analog_input2.8 | length 165.1
  Top Layer w10: R3_U_lab4_analog_input2.2 R4_U_lab4_analog_input2.1 2707.01,3606.3 2703.09,3602.38 2703.09,3564.15 U1_U_lab4_analog_input2.8
NetR5_2: R5.2 U2.31 | length 147.3
  Top Layer w10: R5.2 3554.72,2546.22 U2.31
OUT_N1: R4_U_lab4_analog_input1.2 U1_in1.5 | length 80.8
  Top Layer w10: R4_U_lab4_analog_input1.2 2770,2876.3 2776.91,2869.39 2776.91,2834.15 U1_in1.5
OUT_N2: R4_U_lab4_analog_input2.2 U1_U_lab4_analog_input2.5 | length 80.8
  Top Layer w10: R4_U_lab4_analog_input2.2 2770,3606.3 2776.91,3599.39 2776.91,3564.15 U1_U_lab4_analog_input2.5
OUT_P1: R1_U_lab4_analog_input1.2 U1_in1.4 U2.61 | length 1063.6
  Top Layer w10: R1_U_lab4_analog_input1.2@2772.99,2589.02 R1_U_lab4_analog_input1.2 R1_U_lab4_analog_input1.2@2772.99,2590.98 ; U1_in1.4 2776.91,2665.85 2776.91,2627.62 2772.99,2623.7 R1_U_lab4_analog_input1.2@2772.99,2590.98 ; U2.61 3208.27,2854.53 2957.44,2603.7 2785.71,2603.7 R1_U_lab4_analog_input1.2@2772.99,2590.98
OUT_P2: R1_U_lab4_analog_input2.2 U1_U_lab4_analog_input2.4 U2.59 | length 876.7
  Top Layer w10: R1_U_lab4_analog_input2.2@2772.99,3319.02 R1_U_lab4_analog_input2.2 R1_U_lab4_analog_input2.2@2772.99,3320.98 ; U1_U_lab4_analog_input2.4 2776.91,3395.85 2776.91,3357.62 2772.99,3353.7 R1_U_lab4_analog_input2.2@2772.99,3320.98 ; R1_U_lab4_analog_input2.2@2785.71,3306.3 R1_U_lab4_analog_input2.2@2786.69,3306.3 ; U2.59 3271.26,3495.01 3243.55,3522.72 3109.14,3522.72 2920.12,3333.7 2785.71,3333.7 R1_U_lab4_analog_input2.2@2772.99,3320.98
PA0: P2.6 U2.51 | length 554.2
  Top Layer w10: U2.51 3532.01,3301.93 3532.01,3342.03 3594.97,3404.99 3809.65,3404.99 3855.31,3359.33 3970.12,3359.33 P2.6
PA1: P2.8 U2.50 | length 504.5
  Top Layer w10: U2.50 3563.5,3301.93 3563.5,3331.1 3607.4,3374.99 3811.37,3374.99 3858.53,3327.83 3970.12,3327.83 P2.8
PA2: P2.10 U2.49 | length 444.1
  Top Layer w10: U2.49 3638.07,3344.99 3810.52,3344.99 3859.17,3296.34 3970.12,3296.34 P2.10
PA3: P2.12 U2.48 | length 401.6
  Top Layer w10: U2.48 3667.81,3226.22 3674.1,3232.51 3674.1,3247.17 3741.92,3314.99 3809.02,3314.99 3859.17,3264.84 3970.12,3264.84 P2.12
PC0: P2.40 U2.35 | length 332.6
  Top Layer w10: U2.35 3942.72,2816.77 3948.7,2810.79 P2.40
PC1: P2.38 U2.36 | length 332.6
  Top Layer w10: U2.36 3942.72,2848.27 3948.7,2842.28 P2.38
PC2: P2.36 U2.37 | length 332.6
  Top Layer w10: U2.37 3942.72,2879.76 3948.7,2873.78 P2.36
PC3: P2.34 U2.38 | length 332.6
  Top Layer w10: U2.38 3942.72,2911.26 3948.7,2905.28 P2.34
PC4: P2.32 U2.39 | length 332.6
  Top Layer w10: U2.39 3698.5,2942.76 3704.49,2936.77 P2.32
PC5: P2.30 U2.40 | length 332.6
  Top Layer w10: U2.40 3698.5,2974.25 3704.49,2968.27 P2.30
PC6: P2.28 U2.41 | length 332.6
  Top Layer w10: U2.41 3698.5,3005.75 3704.49,2999.76 P2.28
PC7: P2.26 U2.42 | length 332.6
  Top Layer w10: U2.42 3698.5,3037.24 3704.49,3031.26 P2.26
R\X\_\E\N\: U2.46 U3.8 | length 914.8
  Top Layer w10: v2(3590,3170) 3614.15,3170 3620.92,3163.23 U2.46 ; U3.8 4284.15,2936.77 4287.38,2940 v2(4290,2940)
  Bottom Layer w10: v2(3590,3170) 3825,3170 4055,2940 v2(4290,2940)
RXD0: U2.2 U3.4 | length 1851
  Top Layer w10: U2.2 3102.1,3194.72 3107.38,3200 v2(3110,3200) ; v2(4410,2860) U3.4
  Bottom Layer w10: v2(3110,3200) 3108.15,3198.15 3103.01,3198.15 3085.16,3180.29 3085.16,3159.71 3454.87,2790 4009.06,2790 4082.01,2717.05 4382.18,2717.05 4454.84,2789.71 4454.84,2828.57 4425.27,2858.15 4411.85,2858.15 v2(4410,2860)
TCK: P3.1 U2.57 | length 494.9
  Top Layer w10: P3.1 3334.25,3555.75 U2.57
TDI: P3.9 U2.54 | length 516.6
  Top Layer w10: U2.54 3428.74,3322.32 3391.02,3360.04 3391.02,3467.29 3570,3646.27 P3.9
TDO: P3.3 U2.55 | length 628.1
  Top Layer w10: P3.3 3277.15,3712.85 3277.15,3672.85 v2(3320,3630) ; U2.55 3398.62,3291.77 3398.62,3221.38 v2(3400,3220)
  Bottom Layer w10: v2(3320,3630) 3400,3550 v2(3400,3220)
TMS: P3.5 U2.56 | length 428.6
  Top Layer w10: U2.56 3367.87,3295.28 3367.87,3717.87 P3.5
TX_EN: U2.45 U3.1 | length 1151
  Top Layer w10: v2(3590,3140) 3612.65,3140 3620.92,3131.73 U2.45 ; v2(4410,2780) 4434.84,2780 4435.2,2780.35 4459.33,2780.35 U3.1
  Bottom Layer w10: v2(3590,3140) 3894.84,2835.16 4419.97,2835.16 4434.84,2820.29 4434.84,2799.71 4420.29,2785.16 4417.78,2785.16 4412.62,2780 v2(4410,2780)
TXD0: U2.3 U3.2 | length 1567.8
  Top Layer w10: U2.3 3100.61,3163.23 3107.38,3170 v2(3110,3170) ; v2(4410,2810) 4410.59,2809.41 4461.61,2809.41 U3.2
  Bottom Layer w10: v2(3110,3170) 3470,2810 v2(4410,2810)
pads on no net: P2.0 P2.5 P2.7 P2.9 P2.11 P2.13 P2.14 P2.15 P2.16 P2.17 P2.18 P2.19 P2.20 P2.21 P2.22 P2.23 P2.24 P2.25 P2.27 P2.29 P2.35 P3.7 P3.8 U2.1 U2.4 U2.5 U2.6 U2.7 U2.8 U2.9 U2.10 U2.11 U2.12 U2.13 U2.14 U2.15 U2.16 U2.17 U2.18 U2.19 U2.23 U2.24 U2.25 U2.26 U2.27 U2.28 U2.29 U2.30 U2.32 U2.33 U2.34 U2.43 U2.44 U2.47 U3.3 U3.5 U3.6 U3.13

## Polygon pours and split planes (outlines as drawn)
GND on Bottom Layer "GND_L04_P003" (solid, pour order 3): 2000,4400 4890,4400 4890,1510 2000,1510
GND on Top Layer "GND_L01_P002" (solid, pour order 2): 2000,4400 4890,4400 4890,1510 2000,1510
GND on Mid 2 - GND (split plane): 4901.16,1496.47 1988.6,1496.47 1988.6,4409.04 4901.16,4409.04
5V0 on Mid 1 - POWER (split plane): 4901.16,1496.47 1988.6,1496.47 1988.6,4409.04 4901.16,4409.04

## Dimensions
2165.35,4232.28 to 4724.41,4232.28 on Mechanical 5 (Mech5)
4921.26,1476.38 to 1968.5,1476.38 on Mechanical 5 (Mech5)
4921.26,1476.38 to 4921.26,4429.13 on Mechanical 5 (Mech5)

## Text inside footprints (layer, text, board x,y; h text height)
P3: Top Overlay "2" at 3070,3800 h19.68; Top Overlay "1" at 3090,3700 h19.68; Top Overlay "9" at 3640,3700 h19.68; Top Overlay "10" at 3640,3800 h19.68